# EAGLE board CT_schematic (EAGLE 7.6.0)

Size 100 x 80 mm. Coordinates in mm from the lower left corner, seen from the top.
Outline: 0,0 100,0 100,80 0,80 0,0
Copper layers (1*16): Top 0.035mm / dielectric 1.5mm / Bottom 0.035mm
Design rules "default": minimum track width 10mil, minimum drill 24mil, track to track 8mil, track to pad 8mil, pad to pad 8mil, via to via 8mil, smd to smd 8mil, copper to edge 40mil, drill to drill 8mil, minimum pad ring 10mil, minimum via ring 8mil, stop-mask expansion 4mil, vias tented up to drill 0mil, thermal gap 10mil

## Footprints (pad centres in the part's own frame; a part is rotated, then mirrored left to right if it is on the bottom)
C0603 = smd 0.8 x 0.8: 1 -0.762,0; 2 0.762,0
C0402 = smd 0.5 x 0.5: 1 -0.508,0; 2 0.508,0
C1210 = smd 1.2 x 2.5: 1 -1.524,0; 2 1.524,0
EXV-9H = smd 3.505 x 1.676: 1 -2.857,0; 2 2.857,0
PJ-037B_PACKAGE = drill 3.7 square: 1 12,0 | drill 3.2 square: 2 6,0
R0603 = smd 0.8 x 0.8: 1 -0.762,0; 2 0.762,0
UFQFPN32 = smd 0.6 x 0.3: 1 -2.35,1.75; 2 -2.35,1.25; 3 -2.35,0.75; 4 -2.35,0.25; 5 -2.35,-0.25; 6 -2.35,-0.75; 7 -2.35,-1.25; 8 -2.35,-1.75; 17 2.35,-1.75; 18 2.35,-1.25; 19 2.35,-0.75; 20 2.35,-0.25; 21 2.35,0.25; 22 2.35,0.75; 23 2.35,1.25; 24 2.35,1.75 | smd 0.3 x 0.6: 9 -1.75,-2.35; 10 -1.25,-2.35; 11 -0.75,-2.35; 12 -0.25,-2.35; 13 0.25,-2.35; 14 0.75,-2.35; 15 1.25,-2.35; 16 1.75,-2.35; 25 1.75,2.35; 26 1.25,2.35; 27 0.75,2.35; 28 0.25,2.35; 29 -0.25,2.35; 30 -0.75,2.35; 31 -1.25,2.35; 32 -1.75,2.35 | smd 3.45 x 3.45: EPAD 0,0
TST-110-05-T-D-RA = drill 1 pad 1.7 square: 1 0,0 | drill 1 pad 1.7: 2 0,2.54; 3 2.54,0; 4 2.54,2.54; 5 5.08,0; 6 5.08,2.54; 7 7.62,0; 8 7.62,2.54; 9 10.16,0; 10 10.16,2.54; 11 12.7,0; 12 12.7,2.54; 13 15.24,0; 14 15.24,2.54; 15 17.78,0; 16 17.78,2.54; 17 20.32,0; 18 20.32,2.54; 19 22.86,0; 20 22.86,2.54
TDFN-8/6MM = smd 0.3 x 0.75: 1 0,0; 2 0.5,0; 3 1,0; 4 1.5,0; 5 1.5,3; 6 1,3; 7 0.5,3; 8 0,3
DFN-6 = smd 0.805 x 0.3: 1 -0.952,0.5; 2 -0.952,0; 3 -0.952,-0.5; 4 0.952,-0.5; 5 0.952,0; 6 0.952,0.5 | smd 0.61 x 1.42: 7 0,0
ASEK = smd 1.4 x 1: 1 -1.1,-0.8; 2 1.1,-0.8; 3 1.1,0.8; 4 -1.1,0.8
ASFL1 = smd 1.7 x 1.5: 1 -1.27,-1.1; 2 1.27,-1.1; 3 1.27,1.1; 4 -1.27,1.1
SOIC-8_EP = smd 1.6 x 0.533: 1 -2.921,1.905; 2 -2.921,0.635; 3 -2.921,-0.635; 4 -2.921,-1.905; 5 2.921,-1.905; 6 2.921,-0.635; 7 2.921,0.635; 8 2.921,1.905 | smd 2.54 x 3.302: EPAD 0,0 | drill 0.406 pad 0.406: P$1 -0.508,0.635; P$2 0.381,0.635; P$3 -0.508,-0.635; P$4 0.381,-0.635
SON-6 = smd 0.55 x 0.3: 1 -0.355,0.5 | smd 0.52 x 0.3: 2 -0.37,0; 3 -0.37,-0.5; 4 0.37,-0.5; 5 0.37,0; 6 0.37,0.5
SW_4-1437565-2 = smd 1.4 x 2.1: 1 -2.23,4.55; 2 -2.23,-4.55; 3 2.23,4.55; 4 2.23,-4.55
LGM67K-G1J2-24-Z = smd 0.8 x 1.4: A -2,0; C 0,0
NC7SZ125M5X = smd 1.3 x 0.7: 1 -1.3,0.95; 2 -1.3,0; 3 -1.3,-0.95; 4 1.3,-0.95; 5 1.3,0.95

## Placement (x,y rotation side)
C1  1e-07  [C0603]  -27.94,55.88 0 top  (outside the outline)
C2  1e-07  [C0603]  -31.75,55.88 0 top  (outside the outline)
C3  1e-07  [C0603]  -35.56,55.88 0 top  (outside the outline)
C4  1e-07  [C0603]  -39.37,55.88 0 top  (outside the outline)
C5  4.7e-06  [C0603]  -24.13,55.88 0 top  (outside the outline)
C6  1e-08  [C0603]  -43.18,55.88 0 top  (outside the outline)
C7  1e-06  [C0603]  -46.99,55.88 0 top  (outside the outline)
C8  1e-07  [C0402]  -34.29,60.96 0 top  (outside the outline)
C9  1e-08  [C0402]  -38.1,60.96 0 top  (outside the outline)
C10  1e-07  [C0402]  -41.91,60.96 0 top  (outside the outline)
C11  1e-08  [C0402]  -45.72,60.96 0 top  (outside the outline)
C12  1e-08  [C0402]  -49.53,60.96 0 top  (outside the outline)
C13  1e-05  [C1210]  -29.21,44.45 0 top  (outside the outline)
C14  1e-05  [C1210]  -35.56,44.45 0 top  (outside the outline)
C15  1e-05  [C1210]  -41.91,44.45 0 top  (outside the outline)
C16  1e-05  [C1210]  -48.26,44.45 0 top  (outside the outline)
C17  1e-07  [C0402]  -53.34,60.96 0 top  (outside the outline)
C18  0.0001  [EXV-9H]  -38.1,36.83 0 top  (outside the outline)
C19  0.0001  [EXV-9H]  -49.53,36.83 0 top  (outside the outline)
C20  1e-08  [C0402]  -57.15,60.96 0 top  (outside the outline)
C21  1e-08  [C0402]  -60.96,60.96 0 top  (outside the outline)
J1  PJ-037B  [PJ-037B_PACKAGE]  -27.94,7.62 0 top  (outside the outline)
R1  10000.0  [R0603]  -34.29,50.8 0 top  (outside the outline)
R2  1000.0  [R0603]  -50.8,55.88 0 top  (outside the outline)
R3  1600.5  [R0603]  -54.61,55.88 0 top  (outside the outline)
R4  4700.0  [R0603]  -58.42,55.88 0 top  (outside the outline)
R5  2200.0  [R0603]  -62.23,55.88 0 top  (outside the outline)
R6  2200.0  [R0603]  -15.24,60.96 0 top  (outside the outline)
R7  2200.0  [R0603]  -19.05,60.96 0 top  (outside the outline)
R8  2200.0  [R0603]  -22.86,60.96 0 top  (outside the outline)
R9  10000.0  [R0603]  -39.37,50.8 0 top  (outside the outline)
R10  10000.0  [R0603]  -44.45,50.8 0 top  (outside the outline)
R11  10000.0  [R0603]  -49.53,50.8 0 top  (outside the outline)
R12  10000.0  [R0603]  -54.61,50.8 0 top  (outside the outline)
R13  10000.0  [R0603]  -59.69,50.8 0 top  (outside the outline)
R14  4031.5447154472  [R0603]  -19.05,50.8 0 top  (outside the outline)
R15  2200.0  [R0603]  -26.67,60.96 0 top  (outside the outline)
R16  10000.0  [R0603]  -15.24,55.88 0 top  (outside the outline)
R17  10000.0  [R0603]  -20.32,55.88 0 top  (outside the outline)
R18  9100.0  [R0603]  -30.48,60.96 0 top  (outside the outline)
R19  680000.0  [R0603]  -24.13,50.8 0 top  (outside the outline)
R20  120000.0  [R0603]  -29.21,50.8 0 top  (outside the outline)
U1  STM32L432KCU6  [UFQFPN32]  -25.4,19.05 0 top  (outside the outline)
U2  TST-110-05-T-D-RA  [TST-110-05-T-D-RA]  -46.99,26.67 0 top  (outside the outline)
U3  24AA64T-I/MNY  [TDFN-8/6MM]  -40.64,19.05 0 top  (outside the outline)
U4  SI7006-A20-IM  [DFN-6]  -15.24,64.77 0 top  (outside the outline)
U5  ASEK-32.768KHz-ECST  [ASEK]  -29.21,36.83 0 top  (outside the outline)
U6  ASFL1-12MHZ-NCS  [ASFL1]  -57.15,19.05 0 top  (outside the outline)
U7  MIC5234YME  [SOIC-8_EP]  -59.69,35.56 0 top  (outside the outline)
U8  TPS3895ADRYR  [SON-6]  -17.78,64.77 0 top  (outside the outline)
U9  4-1437565-2  [SW_4-1437565-2]  -44.45,6.35 0 top  (outside the outline)
U10  Q65110A2395  [LGM67K-G1J2-24-Z]  -17.78,44.45 0 top  (outside the outline)
U11  nc7sz125m5x  [NC7SZ125M5X]  -53.34,43.18 0 top  (outside the outline)
U12  nc7sz125m5x  [NC7SZ125M5X]  -59.69,43.18 0 top  (outside the outline)

## Library data of the parts
C1-C21 J1 R1-R20 U1-U12 = circuit_tree

## Nets
CLK_U1_2: U1.2 U5.3
CLK_U1_6: U1.6 U6.3
GND: C1.2 C2.2 C3.2 C4.2 C5.2 C6.2 C7.2 C8.2 C9.2 C10.2 C11.2 C12.2 C13.2 C14.2 C15.2 C16.2 C17.2 C18.2 C19.2 C20.2 C21.2 J1.2 R2.2 R9.2 R11.2 R15.2 R18.2 R20.2 U1.16 U1.32 U1.EPAD U2.4 U2.6 U2.8 U2.10 U2.12 U2.14 U2.16 U2.18 U2.20 U3.4 U3.7 U4.2 U4.7 U5.2 U6.2 U7.7 U7.EPAD U8.2 U10.C U11.2 U11.3 U12.1 U12.3
NET_U1_4: R4.1 U1.4 U12.4
NET_U1_13: R7.1 U1.13 U3.6
NET_U1_19: R5.1 U1.19 U4.6
NET_U1_20: R6.1 U1.20 U4.1
NET_U1_27: R8.1 U1.27 U3.5
NET_U1_30: R3.1 U1.30 U10.A
NET_U1_31: R1.1 R9.1 U1.31 U9.3 U9.4
NET_U3_1: R11.1 U3.1
NET_U3_2: R12.1 U3.2
NET_U3_3: R13.1 U3.3
NET_U7_4: R14.2 R15.1 U7.4
NET_U8_1: R17.1 R18.1 U8.1
NET_U8_3: R19.2 R20.1 U8.3
NET_U8_4: R16.1 U8.4 U11.4 U12.2
NET_U9_1: R2.1 U9.1 U9.2
PROC_SYS_JTCK_SWCLK: U1.24 U2.9
PROC_SYS_JTDO_SWO: U1.26 U2.13
PROC_SYS_JTMS_SWDIO: U1.23 U2.7
RST_OUT_U2_SRESET_B: R10.1 U2.15 U11.1
VCC_S1_11V5: C13.1 C14.1 C18.1 C19.1 J1.1 U7.5 U7.8
VCC_TIER1_3V3: C1.1 C2.1 C3.1 C4.1 C5.1 C6.1 C7.1 C8.1 C9.1 C10.1 C11.1 C12.1 C15.1 C16.1 C17.1 C20.1 C21.1 R1.2 R3.2 R4.2 R5.2 R6.2 R7.2 R8.2 R10.2 R12.2 R13.2 R14.1 R16.2 R17.2 R19.1 U1.1 U1.5 U1.17 U2.1 U3.8 U4.5 U5.4 U6.4 U7.1 U8.6 U11.5 U12.5

## Tracks (layer width: path | path; a pad name or v marks a point on that pad's centre or on a via)
CLK_U1_2  (1 unrouted)
CLK_U1_6  (1 unrouted)
GND  (53 unrouted)
NET_U1_4  (2 unrouted)
NET_U1_13  (2 unrouted)
NET_U1_19  (2 unrouted)
NET_U1_20  (2 unrouted)
NET_U1_27  (2 unrouted)
NET_U1_30  (2 unrouted)
NET_U1_31  (4 unrouted)
NET_U3_1  (1 unrouted)
NET_U3_2  (1 unrouted)
NET_U3_3  (1 unrouted)
NET_U7_4  (2 unrouted)
NET_U8_1  (2 unrouted)
NET_U8_3  (2 unrouted)
NET_U8_4  (3 unrouted)
NET_U9_1  (2 unrouted)
PROC_SYS_JTCK_SWCLK  (1 unrouted)
PROC_SYS_JTDO_SWO  (1 unrouted)
PROC_SYS_JTMS_SWDIO  (1 unrouted)
RST_OUT_U2_SRESET_B  (2 unrouted)
VCC_S1_11V5  (6 unrouted)
VCC_TIER1_3V3  (42 unrouted)